# Altium PCB PCB1.PcbDoc
Units mil, origin at the board's own origin, x right, y up, seen from the top; angles counter-clockwise.
Board outline 2362.2 x 1574.8 mil, 2 copper layers (Top Layer, Bottom Layer); 29 components, 17 nets, 78 pads, 6 vias.
Unrouted connection lines stored in the file: 16.
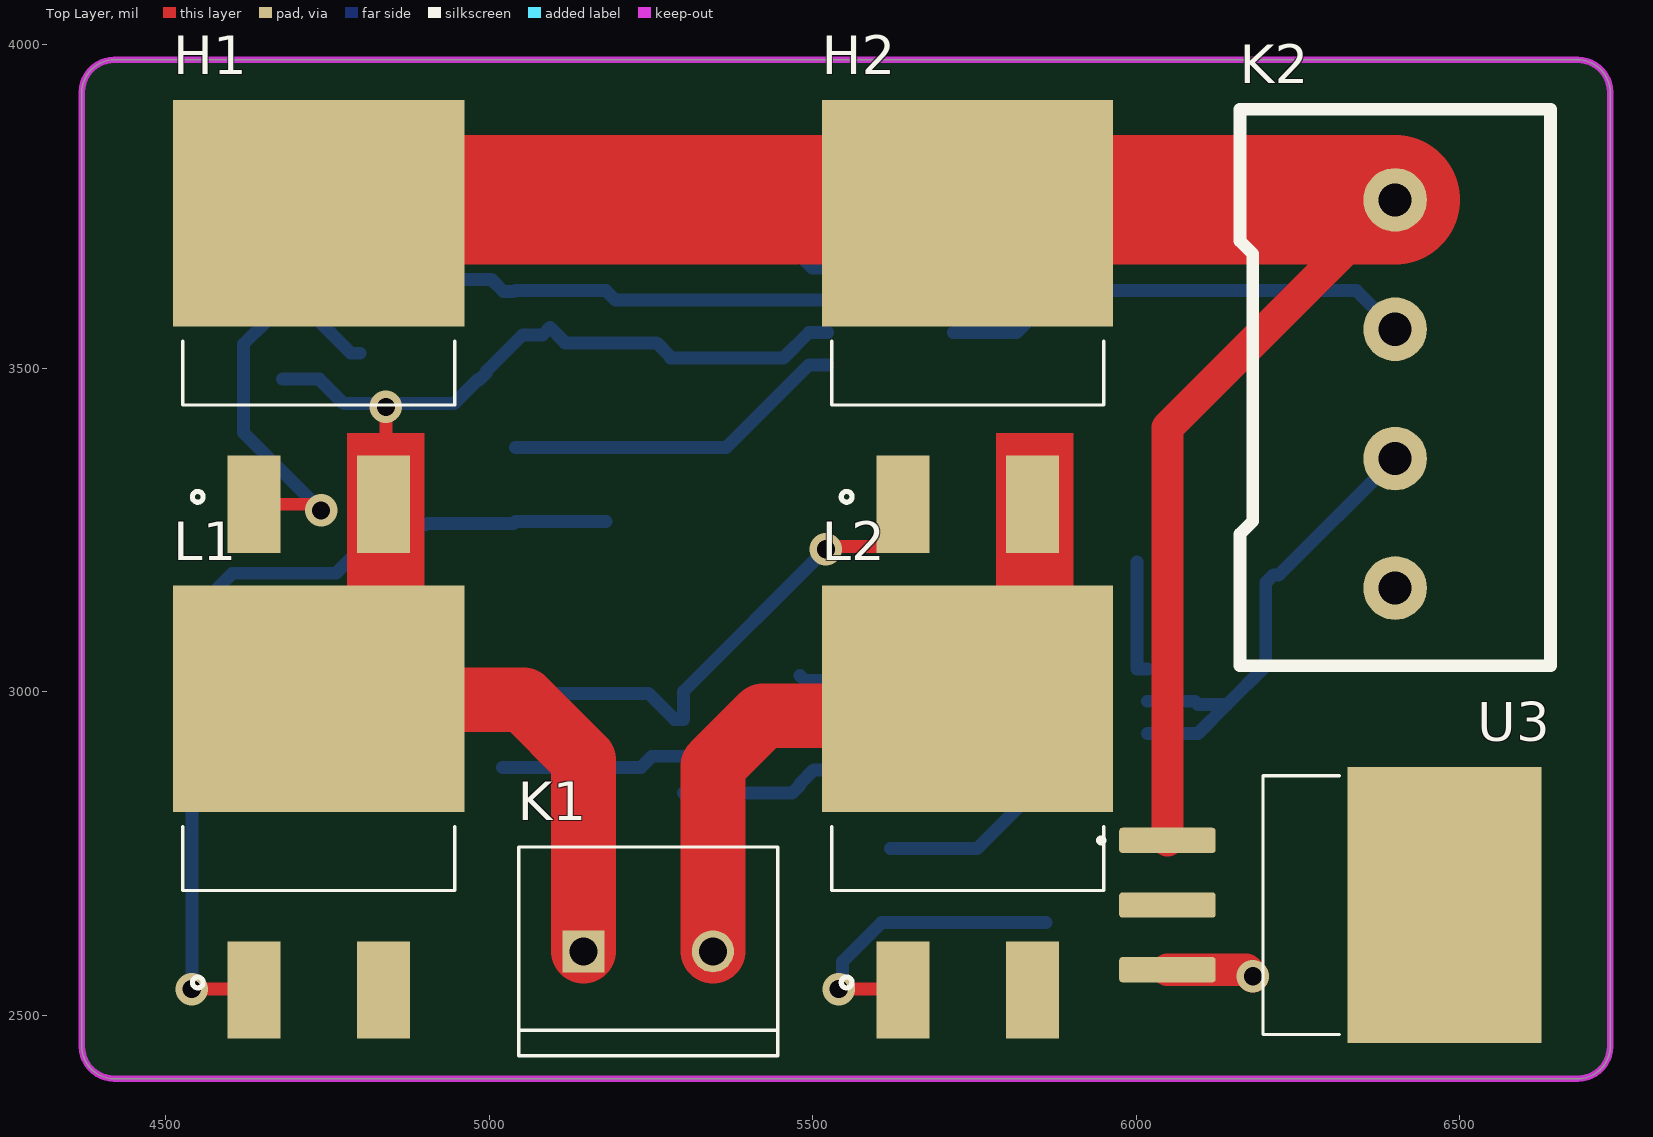
[diagram p0: Top Layer view]
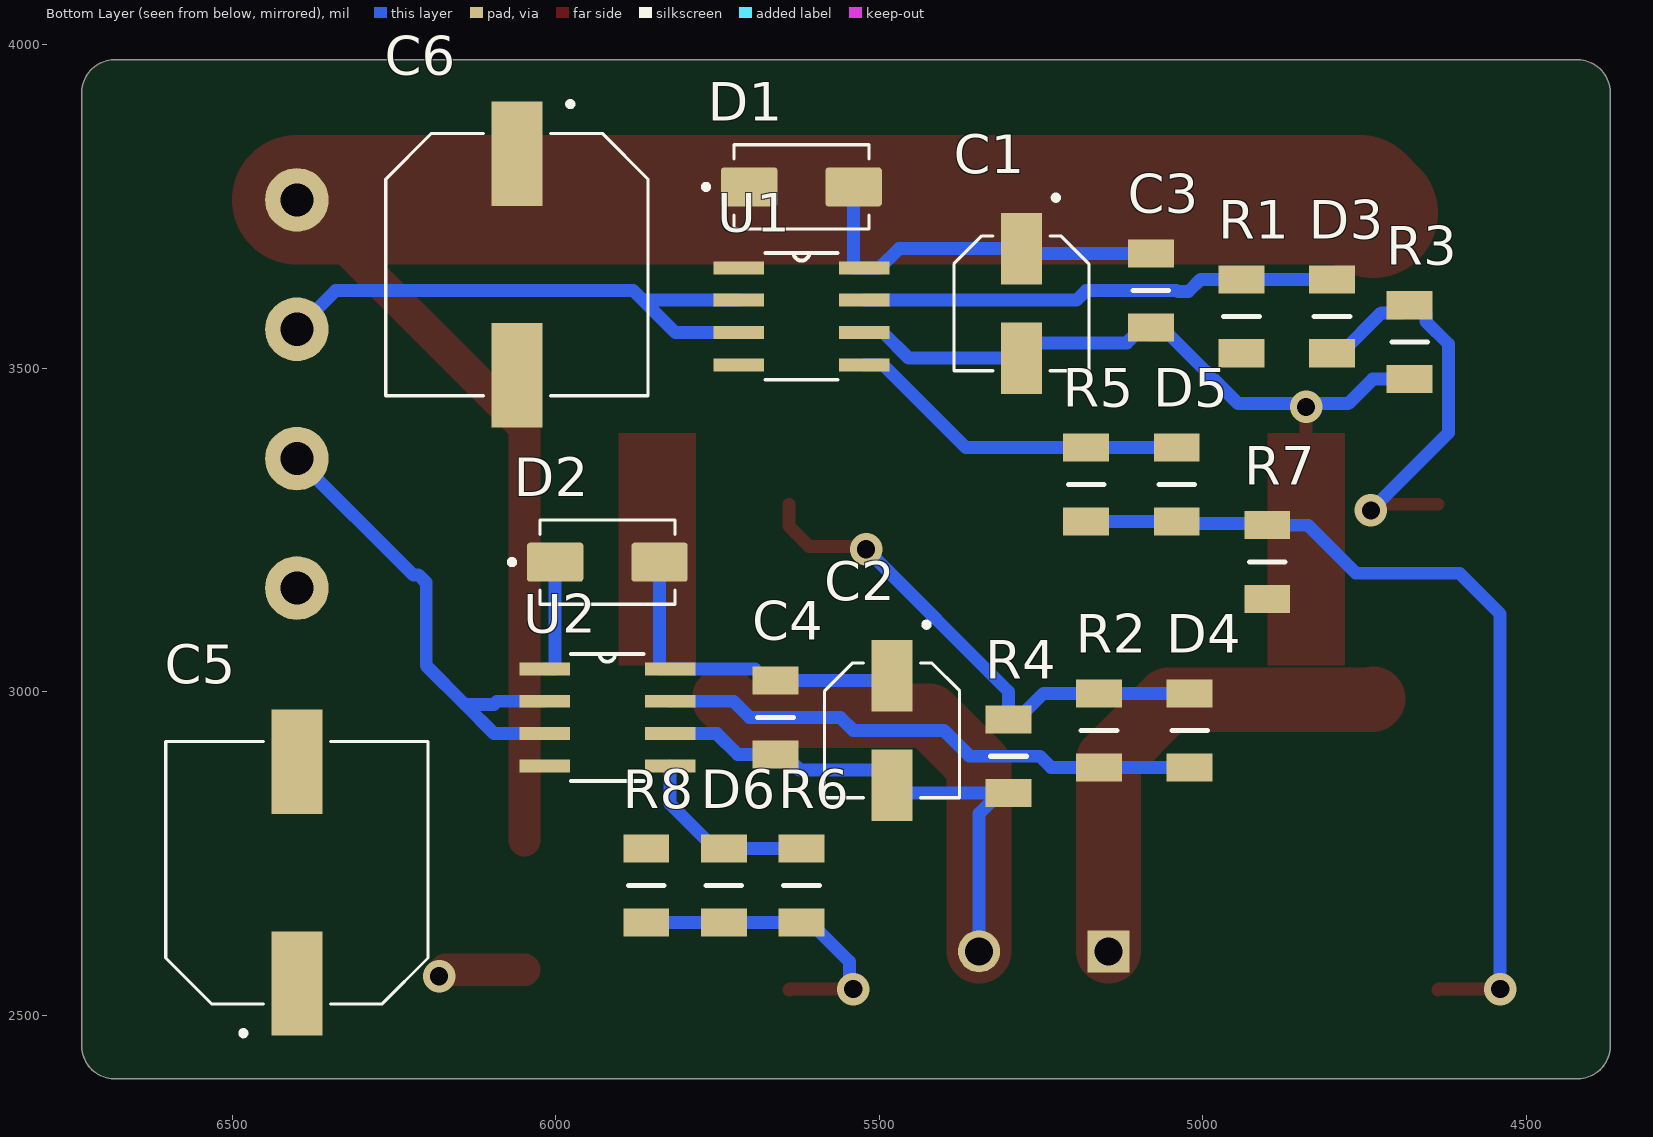
[diagram p1: Bottom Layer view, seen from below]

## Layer stack, top to bottom
Top Solder: solder mask 0.4, Solder Resist, Dk 3.5
Top Layer: signal copper 1.4
Dielectric 1: dielectric 12.6, FR-4, Dk 4.8
Bottom Layer: signal copper 1.4
Bottom Solder: solder mask 0.4, Solder Resist, Dk 3.5

## Board outline
4370.08,2451.57 ccw(c4420.08,2451.57) 4420.08,2401.57 6682.28,2401.57 ccw(c6682.28,2451.57) 6732.28,2451.57 6732.28,3926.38 ccw(c6682.28,3926.38) 6682.28,3976.38 4420.08,3976.38 ccw(c4420.08,3926.38) 4370.08,3926.38

## Design rules (kind name [scope] priority, off if disabled: settings)
Clearance [All] p1: gap=10 ignorepadtopadclearanceinfootprint=FALSE except(0: Arc-Hole Track-Hole SMDPad-Hole THPad-Hole Via-Hole Fill-Hole Poly-Hole Region-Hole Text-Hole)
ComponentClearance [All] p1: gap=10 collisioncheckmode=3 verticalgap=5 showdistances=TRUE
PolygonConnect [All] p1: connectstyle=Relief reliefconductorwidth=10 reliefentries=4 polygonreliefangle="90 Angle" airgapwidth=10
RoutingVias [All] p1: holewidth=28 width=50 viastyle="Through Hole" minholewidth=28 minwidth=50 maxholewidth=28 maxwidth=50
SolderMaskExpansion [All] p1: expansion=4 istentingtop=FALSE
Width [All] p1: maxlimit=200 minlimit=10 preferedwidth=10 minimp=50.000000 maximp=50.000000 favimp=50.000000
29 further rules are at their usual default settings.

## Classes and differential pairs
component class TwoLayerMotorDriver: C1 C2 C3 C4 D1 D2 D3 D4 D5 D6 H1 H2 K1 K2 L1 L2 R1 R2 R3 R4 R5 R6 R7 R8 U1 U2 U3

## Components (designator, comment, footprint, x,y, rotation, side; value= is the part's Value field where it differs from the comment)
C1 "22uF" 22uF-50V_CAP_EEEFN1H220UR 5280,3600 r270 bottom
C2 "22uF" 22uF-50V_CAP_EEEFN1H220UR 5480,2940 r270 bottom
C3 "100nF" "1206 PACKAGE" 5080,3620 r90 bottom
C4 "100nF" "1206 PACKAGE" 5660,2960 r90 bottom
C5 "220uF" 220uF 6400,2720 r90 bottom
C6 "220uF" 220uF 6060,3660 r270 bottom
D1 "Diode" FR1M-13 5620,3780 r180 bottom
D2 "Diode" FR1M-13 5920,3200 r180 bottom
D3 "DIODE" "1206 PACKAGE" 4800,3580 r90 bottom
D4 "DIODE" "1206 PACKAGE" 5020,2940 r270 bottom
D5 "DIODE" "1206 PACKAGE" 5040,3320 r90 bottom
D6 "DIODE" "1206 PACKAGE" 5740,2700 r90 bottom
H1 "IRF3205S_PBF" 3205pbf#1 4736.22,3570.63 r0 top
H2 "IRF3205S_PBF" 3205pbf#2 5739.21,3570.63 r0 top
K1 "2_pin_male_header" 2_pin_male_header 5245.51,2598.43 r0 top
K2 "4 Pin Klemens PCB" "4pin Terminal" 6400,3460 r270 top
L1 "IRF3205S_PBF" 3205pbf#2 4736.22,2820 r0 top
L2 "IRF3205S_PBF" 3205pbf#2 5739.21,2820 r0 top
R1 "10R" "1206 PACKAGE" 4940,3580 r270 bottom
R2 "10R" "1206 PACKAGE" 5160,2940 r270 bottom
R3 "CRCW12061K00FKEAHP" "1206 PACKAGE" 4680,3540 r270 bottom
R4 "CRCW12061K00FKEAHP" "1206 PACKAGE" 5300,2900 r90 bottom
R5 "10R" "1206 PACKAGE" 5180,3320 r270 bottom
R6 "10R" "1206 PACKAGE" 5620,2700 r90 bottom
R7 "CRCW12061K00FKEAHP" "1206 PACKAGE" 4900,3200 r270 bottom
R8 "CRCW12061K00FKEAHP" "1206 PACKAGE" 5860,2700 r270 bottom
U1 "IR2103SPBF" 2103SMD-8SOIC 5620,3580 r180 bottom
U2 "IR2103SPBF" 2103SMD-8SOIC 5920,2960 r180 bottom
U3 "LM7812S/NOPB" lm7812 6325,2660 r270 top

## Footprints (in the part's own frame and the unit in brackets; to place one, negate y for a bottom-side part, rotate by r counter-clockwise, add the part's x,y. Pads: shape width x height; smd on the part's side, far side on the other; paste and mask are expansions set on the pad)
2_pin_male_header [mm] "TE_282837-2"
  rect 1.65x1.65 hole 1.1: 1(-2.54,0)
  round 1.65 hole 1.1: 2(2.54,0)
  silkscreen extent -5.08,-4.1 5.08,4.1, body extent -5.38,-4.14 5.38,4.06, height 9.79
"4pin Terminal" [mm]
  round 2.5 hole 1.3 mask+0.051: 1(-7.62,0) 2(-2.54,0) 3(2.54,0) 4(7.62,0)
  silkscreen extent -11.18,-6.1 10.67,6.1, body extent -10.73,-5.46 10.16,5.74, height 19.34
22uF-50V_CAP_EEEFN1H220UR [mm] "22uF 50V electrolytic smd kondansator"
  rect 2.8x1.6 smd: 1(-2.15,0) 2(2.15,0)
  silkscreen extent -4.25,-2.65 2.65,2.65, body extent -3,-2.65 3,2.65, height 5.8
220uF [mm] "220uF_50V_smd_capacitor"
  rect 4.1x2 smd: 1(-4.35,0) 2(4.35,0)
  silkscreen extent -6.4,-5.15 5.15,5.15, body extent -5.85,-5.15 5.85,5.15, height 10.19
"1206 PACKAGE" [mm] "PACKAGE FOR RESISTOR AND CAPACITOR"
  rect 1.1x1.8 smd: 1(-1.45,0) 2(1.45,0)
  silkscreen extent 0,-0.7 0,0.7, body extent -1.42,-0.8 1.68,0.8, height 0.65
2103SMD-8SOIC [mil]
  rect 78x20 smd: 1(-97,75) 2(-97,25) 3(-97,-25) 4(-97,-75) 5(97,-75) 6(97,-25) 7(97,25) 8(97,75)
  silkscreen extent -56,-98 56,98, body extent -118,-98 118,98, height 69
3205pbf#1 [mm]
  rect 2.08x3.81 smd: 1(-2.54,-7.14) 3(2.54,-7.14)
  rect 11.43x8.89 smd: C(0,4.29)
  silkscreen extent -5.34,-7.06 5.34,-0.74, body extent -5.08,-7.62 5.08,7.62, height 4.83
3205pbf#2 [mm]
  rect 2.08x3.81 smd: 1(-2.54,-7.14) 3(2.54,-7.14)
  rect 11.43x8.89 smd: 2(0,4.29)
  silkscreen extent -5.34,-7.06 5.34,-0.74, body extent -5.08,-7.62 5.08,7.62, height 4.83
FR1M-13 [mm] "1000V 1A DIODE"
  rrect15% 2.21x1.53 smd: A(2.05,0) C(-2.05,0)
  silkscreen extent -3.85,-1.65 2.65,1.65, body extent -2.65,-1.81 2.65,1.81, height 2.5
lm7812 [mm]
  rrect25% 0.99x3.79 smd: 1(-2.794,-7.035) 2(-0.254,-7.035) 3(2.286,-7.035)
  rect 10.84x7.62 smd paste-6: 4(-0.254,3.845)
  silkscreen extent -5.33,-9.73 4.83,-0.29, body extent -5.33,-7.43 4.83,6.93, height 4.65

## Part data
C1 C2: "CAP ALUM 22UF 20% 50V SMD", Package="RADIAL-2 Panasonic", Availability="In Stock", Check_prices=https://www.snapeda.com/parts/EEE-FN1H220UR/Panasonic/view-part/6178088/?ref=eda, MF="Panasonic Electronic Components", MP=EEE-FN1H220UR, Price=None, Purchase-URL=https://pricing.snapeda.com/search/part/EEE-FN1H220UR/?ref=eda, SnapEDA_Link=https://www.snapeda.com/parts/EEE-FN1H220UR/Panasonic/view-part/6178088/?ref=snap, Urun kodu=EEEFN1H220UR
C3 C4: library part "100nF 50V SERAMIC CAPACITOR"
C5 C6: library part "100nF 50V SERAMIC CAPACITOR", Package="RADIAL-2 Panasonic", Availability="In Stock", Check_prices=https://www.snapeda.com/parts/EEEFP1H221AL/Panasonic/view-part/5797279/?ref=eda, MF=Panasonic, MP=EEEFP1H221AL, Price=None, SnapEDA_Link=https://www.snapeda.com/parts/EEEFP1H221AL/Panasonic/view-part/5797279/?ref=snap, Urun adi=EEEFP1H221AL
D1 D2: library part "FR1MDITR DIODE", "Diode Standard 1000 V 1A Surface Mount SMB / https://www.digikey.si/en/products/detail/diodes-incorporated/FR1M-13/743555", manufacturer product number=FR1M-13, part number=FR1MDITR-ND
D3 D4 D5 D6: "Diode Standard 1000 V 1A Surface Mount SMB / https://www.digikey.si/en/products/detail/diodes-incorporated/FR1M-13/743555"
H1 H2 L1 L2: "RoHS Compliant", Package="D2PAK Infineon", Availability=Unavailable, MF="Infineon Technologies", MP=IRF3205SPBF, Price=None, SnapEDA_Link=https://www.snapeda.com/parts/IRF3205SPBF/Infineon%20Technologies/view-part/576468/?ref=snap
K1: "TERM BLOCK 5.08MM 2POS SIDE ENTY", Package=None, Availability=Unavailable, MP=282837-2, Price=None
R1 R2 R5 R6: library part "10 1/4W", "10R 1/4W 1206 RESISTOR_1 CRCW Power Resistor 1206 0.5W 1K 1% Vishay CRCW Series Thick Film High Power Surface Mount Resistor 1206 Case 1k +/-1% 0.5W +/-100ppm/K", Manufacturer_Name=Vishay, Manufacturer_Part_Number=CRCW12061K00FKEAHP, Mouser Part Number=71-CRCW12061K00FKEAH, Datasheet Link=http://componentsearchengine.com/Datasheets/1/CRCW12061K00FKEAHP.pdf, Geometry.Height=0.65mm, Mouser Price/Stock=https://www.mouser.co.uk/ProductDetail/Vishay-Dale/CRCW12061K00FKEAHP?qs=AuiXZzjRd4VaQJAN1hHm0g%3D%3D
R3 R4 R7 R8: library part "1K 1/4W", "1K 1/4W 1206 RESISTOR       CRCW Power Resistor 1206 0.5W 1K 1% Vishay CRCW Series Thick Film High Power Surface Mount Resistor 1206 Case 1k +/-1% 0.5W +/-100ppm/K", Manufacturer_Name=Vishay, Mouser Part Number=71-CRCW12061K00FKEAH, Datasheet Link=http://componentsearchengine.com/Datasheets/1/CRCW12061K00FKEAHP.pdf, Geometry.Height=0.65mm, Manufacturer_Part_Number=CRCW12061K00FKEAHP, Mouser Price/Stock=https://www.mouser.co.uk/ProductDetail/Vishay-Dale/CRCW12061K00FKEAHP?qs=AuiXZzjRd4VaQJAN1hHm0g%3D%3D
U1 U2: "Floating channel designed for bootstrap operation", Package="SOIC-8 Infineon", Availability=Unavailable, MF=Infineon, MP=IR2103SPBF, Price=None, SnapEDA_Link=https://www.snapeda.com/parts/IR2103SPBF/Infineon%20Technologies/view-part/576530/?ref=snap
U3: "1.5-A, 30-V, linear voltage regulator 3-DDPAK/TO-263 0 to 125", Package="TO-263-3 Texas Instruments", Arrow_Electronics-Purchase-URL=https://snapeda.com/shop?store=Arrow+Electronics&id=559615, Availability=Unavailable, DigiKey-Purchase-URL=https://snapeda.com/shop?store=DigiKey&id=559615, MF="Texas Instruments", Mouser-Purchase-URL=https://snapeda.com/shop?store=Mouser&id=559615, MP=LM7812S/NOPB, Price=None, SnapEDA_Link=https://www.snapeda.com/parts/LM7812S/NOPB/Texas%20Instruments/view-part/559615/?ref=snap, Texas_Instruments-Purchase-URL=https://snapeda.com/shop?store=Texas+Instruments&id=559615
K2: Designed By=Bora

## Via types
v1: diameter 50, hole 28, Top Layer to Bottom Layer, 6 vias

## Nets (pads, with @x,y where several pads share a name; then routed paths per layer and width w, separated by ;. In a path a pad name is that pad's centre, name@x,y a point inside that pad or via, vN(x,y) a via of type N, cw(c..) or ccw(c..) an arc to the next point about the centre after c; other vN are vias at no path point)
+12: C5.1 C6.1 D1.C D2.C U1.1 U2.1 U3.3 | length 317.4
  Top Layer w50: U3.3 6170,2570 v1(6180,2560)
  Bottom Layer w20: D2.C 6000.71,3035 U2.1
GND: C5.2 C6.2 K2.4 L1.3 L2.3 R7.2 R8.1 U1.4 U2.4 U3.2 U3.4
HG1: D3.1 H1.1 R1.2 R3.1 | length 658.2
  Top Layer w20: H1.1 4730.47,3289.53 v1(4740,3280)
  Bottom Layer w20: v1(4740,3280) 4620,3400 4620,3537.09 4654.57,3571.65 4654.57,3585.43 4666.22,3597.09 R3.1 4691.65,3585.43 4723.7,3585.43 4786.22,3522.91 D3.1
HG2: D4.1 H2.1 R2.1 R4.2 | length 818.6
  Top Layer w20: v1(5520,3220) 5524.53,3224.53 5608.27,3224.53 5639.21,3255.47 H2.1
  Bottom Layer w20: D4.1 R2.1 5246.22,2997.09 5286.22,2957.09 R4.2 5300,3000 v1(5520,3220)
IN1: K2.2 U1.2 U1.3 | length 882.8
  Bottom Layer w20: U1.3 5815,3555 5865,3605 ; U1.2 5865,3605 ; K2.2 6340,3620 5880,3620 5865,3605
IN2: K2.3 U2.2 U2.3 | length 759.3
  Bottom Layer w20: U2.3 6095,2935 6140,2980 ; U2.2 6090.5,2985 6095.5,2980 6140,2980 ; K2.3 6220,3180 6211.72,3180 6200,3168.28 6200,3040 6140,2980
LG1: D5.1 L1.1 R5.2 R7.1 | length 1375.9
  Top Layer w20: v1(4540,2540) 4635.12,2540 L1.1
  Bottom Layer w20: v1(4540,2540) 4540,3120 4602.81,3182.81 4762.81,3182.81 4837.09,3257.09 R7.1 4902.91,3260 5037.09,3260 D5.1 R5.2
LG2: D6.1 L2.1 R6.1 R8.2 | length 483.8
  Top Layer w20: v1(5540,2540) 5638.11,2540 L2.1
  Bottom Layer w20: v1(5540,2540) 5545.74,2545.74 5545.74,2582.43 5606.22,2642.91 R6.1 D6.1 R8.2
M1: C1.2 C3.1 H1.3 K1.1 L1.2 R3.2 U1.6 | length 1843.2
  Top Layer w20: H1.3 4836.22,3323.58 4840,3327.36 v1(4840,3440)
  Top Layer w100: L1.2 4737.76,2987.36 5052.64,2987.36 5145.51,2894.49 K1.1
  Bottom Layer w20: R3.2 4737.09,3482.91 4775,3445 4840,3445 4945,3445 4981.26,3481.26 4983.72,3481.26 4995.43,3492.98 4995.43,3495.43 5051.26,3551.26 5082.13,3551.26 5093.78,3562.91 5105.43,3551.26 5105.43,3550.69 5117.15,3538.98 5258.5,3538.98 5280,3517.48 C1.2 5454.35,3515.35 5494,3555 U1.6
M2: C2.2 C4.1 H2.3 K1.2 L2.2 R4.1 U2.6 | length 1544
  Top Layer w100: K1.2 5345.51,2885.51 5422.79,2962.79 5713.11,2962.79 L2.2
  Bottom Layer w20: R4.1 R4.1@5313.78,2842.91 ; K1.2 5345.51,2811.18 R4.1@5313.78,2842.91 ; U2.6 5750.91,2935 5718.82,2902.91 5646.22,2902.91 5634.57,2891.26 5634.57,2890.69 5622.85,2878.98 5501.5,2878.98 5480,2857.48 C2.2 5467.56,2842.91 R4.1@5313.78,2842.91
NetC1_1: C1.1 C3.2 D1.A U1.8 | length 599.7
  Bottom Layer w20: C3.2 5272.44,3677.09 C1.1 5469.35,3684.65 5499,3655 U1.8 5539.29,3655 D1.A
NetC2_1: C2.1 C4.2 D2.A U2.8 | length 534.8
  Bottom Layer w20: C2.1 5487.56,3017.09 C4.2 5673.78,3017.09 5691.69,3035 U2.8 5839.29,3035 D2.A
NetD3_2: D3.2 R1.1 U1.7 | length 737.7
  Bottom Layer w20: D3.2 R1.1 5002.91,3637.09 5021.72,3618.28 5038.28,3618.28 5040,3620 5180,3620 5195,3605 U1.7
NetD4_2: D4.2 R2.2 U2.7 | length 845.3
  Bottom Layer w20: D4.2 R2.2 5234.17,2882.91 5251.26,2900 5360,2900 5400,2940 5540,2940 5560,2960 5700,2960 5725,2985 U2.7
NetD5_2: D5.2 R5.1 U1.5 | length 536
  Bottom Layer w20: D5.2 R5.1 5366.09,3377.09 5494,3505 U1.5
NetD6_2: D6.2 R6.2 U2.5 | length 290.4
  Bottom Layer w20: R6.2 D6.2 5753.78,2757.09 5823,2826.31 U2.5
VCC: H1.C H2.2 K2.1 U3.1 | length 2808
  Top Layer w50: U3.1 6048.03,3408.03 K2.1
  Top Layer w200: H1.C 4756.69,3760 K2.1

## Keep-outs
Top Layer:
  lines w10: 4370.08,2451.57 ccw(c4420.08,2451.57) 4420.08,2401.57 4448.82,2401.57 6653.54,2401.57 6682.28,2401.57 ccw(c6682.28,2451.57) 6732.28,2451.57 6732.28,2480.32 6732.28,3897.64 6732.28,3926.38 ccw(c6682.28,3926.38) 6682.28,3976.38 6653.54,3976.38 4448.82,3976.38 4420.08,3976.38 ccw(c4420.08,3926.38) 4370.08,3926.38 4370.08,3897.64 4370.08,2480.32 4370.08,2451.57

## Other copper
Top Layer:
  rectangle net M2: 5782.99,3040 5902.99,3400
  rectangle net M1: 4780,3040 4900,3400